# EAGLE board Fabulous Amur (EAGLE 9.7.0)

Size 164.46 x 56.6 mm. Coordinates in mm from the lower left corner, seen from the top.
Outline: 0,0 164.47,0 164.47,56.59 0,56.59 0,0
Copper layers (1*16): Top 0.035mm / dielectric 1.5mm / Bottom 0.035mm
Design rules "default": minimum track width 6mil, minimum drill 0.35mm, track to track 6mil, track to pad 6mil, pad to pad 6mil, via to via 6mil, smd to smd 6mil, copper to edge 40mil, drill to drill 6mil, minimum pad ring 10mil, minimum via ring 8mil, stop-mask expansion 4mil, vias tented up to drill 0mil, thermal gap 10mil

## Footprints (pad centres in the part's own frame; a part is rotated, then mirrored left to right if it is on the bottom)
BATTERY-GENERIC = drill 1.118 pad 3.15 octagon: + 2.54,0; - -2.54,0
CAP-THRU-2.54MM = drill 1.016 pad 1.88: 1 -1.27,0; 2 1.27,0
LEDRD254W60D565H860B = drill 0.981 pad 1.581: 1 -1.27,0; 2 1.27,0
RESAD1016W63L850D250B = drill 0.83 pad 1.43: 1 -5.08,0; 2 5.08,0
DIP762W53P254L1969H508Q14B = drill 0.743 pad 1.343: 1 -3.81,7.62; 2 -3.81,5.08; 3 -3.81,2.54; 4 -3.81,0; 5 -3.81,-2.54; 6 -3.81,-5.08; 7 -3.81,-7.62; 8 3.81,-7.62; 9 3.81,-5.08; 10 3.81,-2.54; 11 3.81,0; 12 3.81,2.54; 13 3.81,5.08; 14 3.81,7.62
DIP826W53P254L959H508Q8B = drill 0.786 pad 1.386: 1 -4.13,3.81; 2 -4.13,1.27; 3 -4.13,-1.27; 4 -4.13,-3.81; 5 4.13,-3.81; 6 4.13,-1.27; 7 4.13,1.27; 8 4.13,3.81

## Placement (x,y rotation side)
BAT1  9V  [BATTERY-GENERIC]  156.21,48.34 270 top
C1  100n  [CAP-THRU-2.54MM]  7.62,14.05 0 top
D1  RED  [LEDRD254W60D565H860B]  93.98,39.45 180 top
D2  RED  [LEDRD254W60D565H860B]  101.6,39.45 180 top
D3  RED  [LEDRD254W60D565H860B]  109.22,39.45 180 top
R1  1k  [RESAD1016W63L850D250B]  105.41,11.51 180 top
R2  1k  [RESAD1016W63L850D250B]  8.89,41.99 90 top
R3  1k  [RESAD1016W63L850D250B]  16.51,19.13 180 top
R4  470k  [RESAD1016W63L850D250B]  16.51,34.37 0 top
R5  400k  [RESAD1016W63L850D250B]  77.47,8.97 90 top
R6  1k  [RESAD1016W63L850D250B]  85.09,36.91 180 top
U1  74HC74_PDIP  [DIP762W53P254L1969H508Q14B]  39.37,25.48 90 top
U2  74HC74_PDIP  [DIP762W53P254L1969H508Q14B]  69.85,25.48 90 top
U3  LM555_DIP  [DIP826W53P254L959H508Q8B]  10.16,25.48 90 top

## Library data of the parts
BAT1 C1 R1-R6 U1 U2 = Tinkercad
D1-D3 = Tinkercad; CATEGORY: Opto-Electronic; SUB-CATEGORY: LED; VALUE: LED_RED
U3 = Tinkercad; CATEGORY: IC_Clock-Timing; CURRENT-SUPPLY: 10mA; DESCRIPTION: IC OSC SINGLE TIMER 100KHZ 8-DIP; FREQUENCY: 100kHz; MANUFACTURER: Texas Instruments; MPN: LM555CN/NOPB; OPERATING_TEMP: 0°C to 70°C; PART_STATUS: Active; ROHS_COMPLIANT: ROHS3 Compliant; SUB-CATEGORY: Timer

## Nets
BAT1+: BAT1.+ R2.2 U1.1 U1.4 U1.10 U1.13 U1.14 U2.14 U3.4 U3.8
BAT1-: BAT1.- C1.1 D1.2 D2.2 D3.2 R1.1 R1.2 R5.1 U1.7 U3.1
D2_A: D2.1 R6.1
U1_CLK2: U1.6 U1.11
U1_D1: D1.1 U1.2 U1.5
U1_D2: R6.2 U1.8 U1.12
U2_GND: R5.2 U2.7
U3_CV: R4.2 U3.5
U3_DIS: R2.1 U3.7
U3_OUT: R3.2 U1.3 U3.3
U3_THR: R4.1 U3.6
U3_TR: C1.2 U3.2

## Tracks (layer width: path | path; a pad name or v marks a point on that pad's centre or on a via)
BAT1+  (9 unrouted)
BAT1-  (9 unrouted)
D2_A  (1 unrouted)
U1_CLK2  (1 unrouted)
U1_D1  (2 unrouted)
U1_D2  (2 unrouted)
U2_GND  (1 unrouted)
U3_CV  (1 unrouted)
U3_DIS  (1 unrouted)
U3_OUT  (2 unrouted)
U3_THR  (1 unrouted)
U3_TR  (1 unrouted)